# Altium PCB NRF24L01PA-MINI_2020-04-24_02-18-02.pcbdoc
Units mil, origin at the board's own origin, x right, y up, seen from the top; angles counter-clockwise.
Board outline 1844.37 x 1532.51 mil, 2 copper layers (Top Layer, Bottom Layer); 42 components, 47 nets, 169 pads, 50 vias.
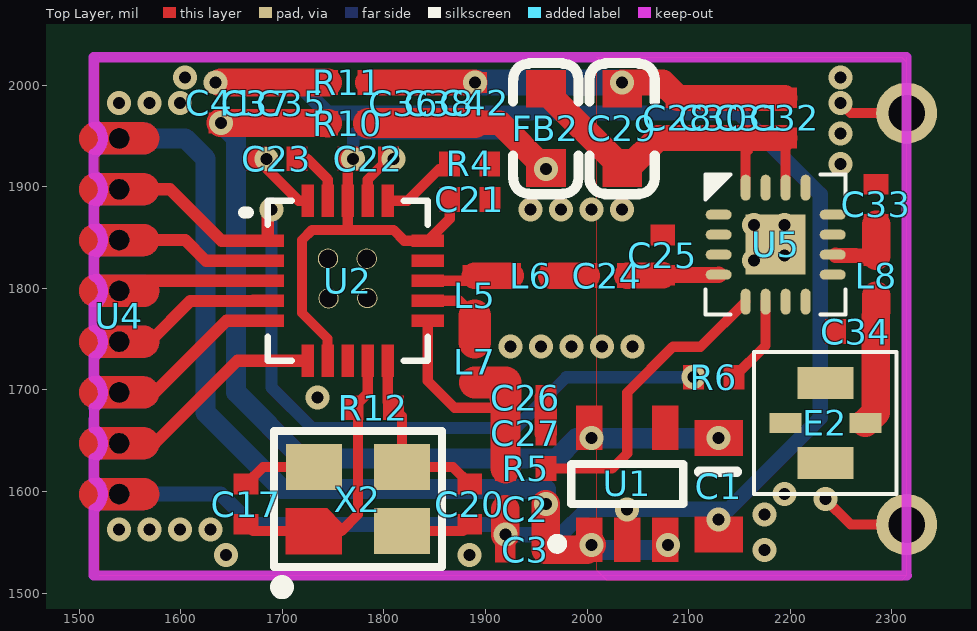
[diagram p0: Top Layer view]
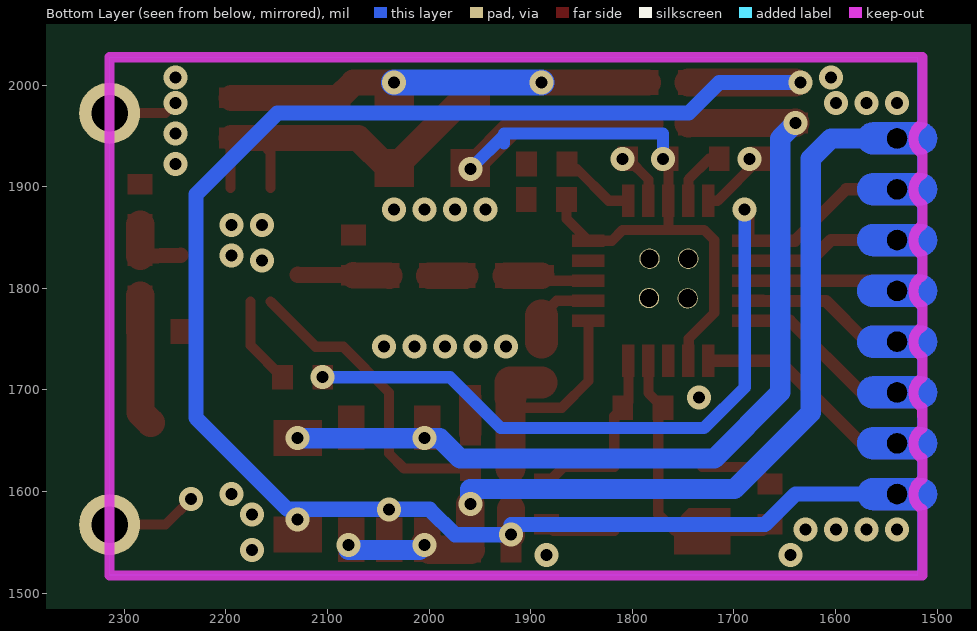
[diagram p1: Bottom Layer view, seen from below]

## Layer stack, top to bottom
Top Layer: signal copper (thickness not stored)
Dielectric: dielectric 12.6, FR-4, Dk 4.8
Bottom Layer: signal copper (thickness not stored)

## Board outline
2844.37,1000 1000,1000 1000,2532.51 2844.37,2532.51

## Components (designator, comment, footprint, x,y, rotation, side; value= is the part's Value field where it differs from the comment)
C1 "47uF" 0805 2129.37,1652.51 r270 top
C2 "2.2nF" AP-04021 1944.37,1582.51 r180 top
C3 "4.7pF" AP-04021 1944.37,1542.51 r180 top
C17 "22pF" AP-04021 1664.37,1582.51 r90 top
C20 "22pF" AP-04021 1884.37,1582.51 r90 top
C21 "10nF" AP-04021 1879.37,1887.51 r0 top
C22 "1nF" AP-04021 1779.37,1927.51 r0 top
C23 "33nF" AP-04021 1689.37,1927.51 r0 top
C24 "1.5pF" AP-04021 2014.37,1812.51 r0 top
C25 "1.0pF" AP-04021 2074.37,1827.51 r90 top
C26 "2.2nF" AP-04021 1934.37,1692.51 r0 top
C27 "4.7pF" AP-04021 1934.37,1657.51 r0 top
C28 "2.2uF" AP-04021 2089.37,1962.51 r90 top
C29 "22uF" C_0603 2034.37,1957.51 r90 top
C30 "0.1uF" AP-04021 2124.37,1962.51 r90 top
C31 "10nF" AP-04021 2159.37,1962.51 r90 top
C32 "220pF" AP-04021 2194.37,1962.51 r90 top
C33 "1.0pF" AP-04021 2284.37,1877.51 r90 top
C34 "1.0pF" AP-04021 2269.37,1757.51 r180 top
C35 "104" AP-04021 1709.37,1987.51 r270 top
C36 "106" AP-04021 1819.37,1987.51 r270 top
C37 "106" AP-04021 1674.37,1987.51 r270 top
C38 "104" AP-04021 1854.37,1987.51 r270 top
C41 "22uF" AP-04021 1639.37,1977.51 r90 top
C42 "22uF" AP-04021 1889.37,1977.51 r90 top
E2 "Antenna" IPEX 2234.37,1667.51 r0 top
FB2 "22k 1%" C_0603 1959.37,1957.51 r90 top
L5 "8.2nH" AP-04021 1889.37,1787.51 r90 top
L6 "3.9nH" AP-04021 1939.37,1812.51 r0 top
L7 "2.7nH" AP-04021 1889.37,1732.51 r270 top
L8 "3.9nH" AP-04021 2284.37,1817.51 r270 top
R4 "22k 1%" AP-04021 1889.37,1922.51 r180 top
R5 "1k" AP-04021 1934.37,1622.51 r0 top
R6 "1k" AP-04021 2119.37,1712.51 r0 top
R10 "0" AP-04021 1759.37,1962.51 r0 top
R11 "0" AP-04021 1759.37,2002.51 r0 top
R12 "1M" AP-04021 1784.37,1682.51 r0 top
U1 "LP5907" SOT23-5 2039.37,1607.51 r270 top
U2 "NRF24L01" NRF24L01 1764.37,1807.51 r0 top
U4 "GT-24" GT-24-1 1539.37,1772.51 r0 top
U5 "RFX2401C" RFX2401C 2129.37,1872.51 r0 top
X2 "16MHz" OSC-SMD_4P-L3.2-W2.5-BL 1774.37,1592.51 r0 top

## Footprints (in the part's own frame and the unit in brackets; to place one, negate y for a bottom-side part, rotate by r counter-clockwise, add the part's x,y. Pads: shape width x height; smd on the part's side, far side on the other; paste and mask are expansions set on the pad)
0805 [mil]
  round 0 smd: 1(0,0) 2(95,0)
  Top Layer region: -17.5,23.5 17.5,23.5 17.5,-23.5 -17.5,-23.5
  Top Layer region: 77.5,23.5 112.5,23.5 112.5,-23.5 77.5,-23.5
  silkscreen extent 33,-19 33,18
AP-04021 [mil]
  round 0 smd: 1(-14.68,0) 2(25,0) 2(25,0)
  Top Layer region: 15,12 35,12 35,-12 15,-12
  Top Layer region: 15,12 35,12 35,-12 15,-12
  Top Layer region: -24.69,12 -4.69,12 -4.69,-12 -24.69,-12
C_0603 [mil]
  round 0 smd: 1(-38.97,0) 2(38.97,0)
  Top Layer region: -57.28,19.29 -20.66,19.29 -20.66,-19.29 -57.28,-19.29
  Top Layer region: 20.66,19.29 57.28,19.29 57.28,-19.29 20.66,-19.29
  silkscreen extent -65,-32 64,32
GT-24-1 [mil]
  round 0 hole 19.69 slot 19.89 at 90 deg: 1(0,175) 2(0,125) 3(0,75) 4(0,25) 5(0,-25) 6(0,-75) 7(0,-125) 8(0,-175)
  Top Layer region: -23.62,159.25 -24.61,159.28 -25.6,159.38 -26.57,159.53 -27.54,159.75 -28.49,160.02 -29.42,160.36 -30.33,160.75 -31.21,161.2 -32.06,161.7 -32.88,162.26 -33.66,162.87 -34.4,163.52 -35.1,164.22 -35.76,164.96 -36.36,165.74 -36.92,166.56 -37.42,167.41 -37.87,168.29 -38.26,169.2 -38.6,170.13 -38.88,171.08 -39.09,172.05 -39.25,173.03 -39.34,174.01 -39.37,175 -39.34,175.99 -39.25,176.97 -39.09,177.95 -38.88,178.92 -38.6,179.87 -38.26,180.8 -37.87,181.7 -37.42,182.59 -36.92,183.44 -36.36,184.26 -35.76,185.04 -35.1,185.78 -34.4,186.48 -33.66,187.13 -32.88,187.74 -32.06,188.3 -31.21,188.8 -30.33,189.25 -29.42,189.64 -28.49,189.98 -27.54,190.25 -26.57,190.47 -25.6,190.62 -24.61,190.72 -23.62,190.75 23.62,190.75 24.61,190.72 25.6,190.62 26.57,190.47 27.54,190.25 28.49,189.98 29.42,189.64 30.33,189.25 31.21,188.8 32.06,188.3 32.88,187.74 33.66,187.13 34.4,186.48 35.1,185.78 35.76,185.04 36.36,184.26 36.92,183.44 37.42,182.59 37.87,181.7 38.26,180.8 38.6,179.87 38.88,178.92 39.09,177.95 39.25,176.97 39.34,175.99 39.37,175 39.34,174.01 39.25,173.03 39.09,172.05 38.88,171.08 38.6,170.13 38.26,169.2 37.87,168.29 37.42,167.41 36.92,166.56 36.36,165.74 35.76,164.96 35.1,164.22 34.4,163.52 33.66,162.87 32.88,162.26 32.06,161.7 31.21,161.2 30.33,160.75 29.42,160.36 28.49,160.02 27.54,159.75 26.57,159.53 25.6,159.38 24.61,159.28 23.62,159.25
  Top Layer region: -23.62,109.25 -24.61,109.28 -25.6,109.38 -26.57,109.53 -27.54,109.75 -28.49,110.02 -29.42,110.36 -30.33,110.75 -31.21,111.2 -32.06,111.7 -32.88,112.26 -33.66,112.87 -34.4,113.52 -35.1,114.22 -35.76,114.96 -36.36,115.74 -36.92,116.56 -37.42,117.41 -37.87,118.29 -38.26,119.2 -38.6,120.13 -38.88,121.08 -39.09,122.05 -39.25,123.03 -39.34,124.01 -39.37,125 -39.34,125.99 -39.25,126.97 -39.09,127.95 -38.88,128.92 -38.6,129.87 -38.26,130.8 -37.87,131.7 -37.42,132.59 -36.92,133.44 -36.36,134.26 -35.76,135.04 -35.1,135.78 -34.4,136.48 -33.66,137.13 -32.88,137.74 -32.06,138.3 -31.21,138.8 -30.33,139.25 -29.42,139.64 -28.49,139.98 -27.54,140.25 -26.57,140.47 -25.6,140.62 -24.61,140.72 -23.62,140.75 23.62,140.75 24.61,140.72 25.6,140.62 26.57,140.47 27.54,140.25 28.49,139.98 29.42,139.64 30.33,139.25 31.21,138.8 32.06,138.3 32.88,137.74 33.66,137.13 34.4,136.48 35.1,135.78 35.76,135.04 36.36,134.26 36.92,133.44 37.42,132.59 37.87,131.7 38.26,130.8 38.6,129.87 38.88,128.92 39.09,127.95 39.25,126.97 39.34,125.99 39.37,125 39.34,124.01 39.25,123.03 39.09,122.05 38.88,121.08 38.6,120.13 38.26,119.2 37.87,118.29 37.42,117.41 36.92,116.56 36.36,115.74 35.76,114.96 35.1,114.22 34.4,113.52 33.66,112.87 32.88,112.26 32.06,111.7 31.21,111.2 30.33,110.75 29.42,110.36 28.49,110.02 27.54,109.75 26.57,109.53 25.6,109.38 24.61,109.28 23.62,109.25
  Top Layer region: -23.62,59.25 -24.61,59.28 -25.6,59.38 -26.57,59.53 -27.54,59.75 -28.49,60.02 -29.42,60.36 -30.33,60.75 -31.21,61.2 -32.06,61.7 -32.88,62.26 -33.66,62.87 -34.4,63.52 -35.1,64.22 -35.76,64.96 -36.36,65.74 -36.92,66.56 -37.42,67.41 -37.87,68.29 -38.26,69.2 -38.6,70.13 -38.88,71.08 -39.09,72.05 -39.25,73.03 -39.34,74.01 -39.37,75 -39.34,75.99 -39.25,76.97 -39.09,77.95 -38.88,78.92 -38.6,79.87 -38.26,80.8 -37.87,81.7 -37.42,82.59 -36.92,83.44 -36.36,84.26 -35.76,85.04 -35.1,85.78 -34.4,86.48 -33.66,87.13 -32.88,87.74 -32.06,88.3 -31.21,88.8 -30.33,89.25 -29.42,89.64 -28.49,89.98 -27.54,90.25 -26.57,90.47 -25.6,90.62 -24.61,90.72 -23.62,90.75 23.62,90.75 24.61,90.72 25.6,90.62 26.57,90.47 27.54,90.25 28.49,89.98 29.42,89.64 30.33,89.25 31.21,88.8 32.06,88.3 32.88,87.74 33.66,87.13 34.4,86.48 35.1,85.78 35.76,85.04 36.36,84.26 36.92,83.44 37.42,82.59 37.87,81.7 38.26,80.8 38.6,79.87 38.88,78.92 39.09,77.95 39.25,76.97 39.34,75.99 39.37,75 39.34,74.01 39.25,73.03 39.09,72.05 38.88,71.08 38.6,70.13 38.26,69.2 37.87,68.29 37.42,67.41 36.92,66.56 36.36,65.74 35.76,64.96 35.1,64.22 34.4,63.52 33.66,62.87 32.88,62.26 32.06,61.7 31.21,61.2 30.33,60.75 29.42,60.36 28.49,60.02 27.54,59.75 26.57,59.53 25.6,59.38 24.61,59.28 23.62,59.25
  Top Layer region: -23.62,9.25 -24.61,9.28 -25.6,9.38 -26.57,9.53 -27.54,9.75 -28.49,10.02 -29.42,10.36 -30.33,10.75 -31.21,11.2 -32.06,11.7 -32.88,12.26 -33.66,12.87 -34.4,13.52 -35.1,14.22 -35.76,14.96 -36.36,15.74 -36.92,16.56 -37.42,17.41 -37.87,18.29 -38.26,19.2 -38.6,20.13 -38.88,21.08 -39.09,22.05 -39.25,23.03 -39.34,24.01 -39.37,25 -39.34,25.99 -39.25,26.97 -39.09,27.95 -38.88,28.92 -38.6,29.87 -38.26,30.8 -37.87,31.7 -37.42,32.59 -36.92,33.44 -36.36,34.26 -35.76,35.04 -35.1,35.78 -34.4,36.48 -33.66,37.13 -32.88,37.74 -32.06,38.3 -31.21,38.8 -30.33,39.25 -29.42,39.64 -28.49,39.98 -27.54,40.25 -26.57,40.47 -25.6,40.62 -24.61,40.72 -23.62,40.75 23.62,40.75 24.61,40.72 25.6,40.62 26.57,40.47 27.54,40.25 28.49,39.98 29.42,39.64 30.33,39.25 31.21,38.8 32.06,38.3 32.88,37.74 33.66,37.13 34.4,36.48 35.1,35.78 35.76,35.04 36.36,34.26 36.92,33.44 37.42,32.59 37.87,31.7 38.26,30.8 38.6,29.87 38.88,28.92 39.09,27.95 39.25,26.97 39.34,25.99 39.37,25 39.34,24.01 39.25,23.03 39.09,22.05 38.88,21.08 38.6,20.13 38.26,19.2 37.87,18.29 37.42,17.41 36.92,16.56 36.36,15.74 35.76,14.96 35.1,14.22 34.4,13.52 33.66,12.87 32.88,12.26 32.06,11.7 31.21,11.2 30.33,10.75 29.42,10.36 28.49,10.02 27.54,9.75 26.57,9.53 25.6,9.38 24.61,9.28 23.62,9.25
  Top Layer region: -23.62,-40.75 -24.61,-40.72 -25.6,-40.62 -26.57,-40.47 -27.54,-40.25 -28.49,-39.98 -29.42,-39.64 -30.33,-39.25 -31.21,-38.8 -32.06,-38.3 -32.88,-37.74 -33.66,-37.13 -34.4,-36.48 -35.1,-35.78 -35.76,-35.04 -36.36,-34.26 -36.92,-33.44 -37.42,-32.59 -37.87,-31.71 -38.26,-30.8 -38.6,-29.87 -38.88,-28.92 -39.09,-27.95 -39.25,-26.97 -39.34,-25.99 -39.37,-25 -39.34,-24.01 -39.25,-23.03 -39.09,-22.05 -38.88,-21.08 -38.6,-20.13 -38.26,-19.2 -37.87,-18.3 -37.42,-17.41 -36.92,-16.56 -36.36,-15.74 -35.76,-14.96 -35.1,-14.22 -34.4,-13.52 -33.66,-12.87 -32.88,-12.26 -32.06,-11.7 -31.21,-11.2 -30.33,-10.75 -29.42,-10.36 -28.49,-10.02 -27.54,-9.75 -26.57,-9.53 -25.6,-9.38 -24.61,-9.28 -23.62,-9.25 23.62,-9.25 24.61,-9.28 25.6,-9.38 26.57,-9.53 27.54,-9.75 28.49,-10.02 29.42,-10.36 30.33,-10.75 31.21,-11.2 32.06,-11.7 32.88,-12.26 33.66,-12.87 34.4,-13.52 35.1,-14.22 35.76,-14.96 36.36,-15.74 36.92,-16.56 37.42,-17.41 37.87,-18.3 38.26,-19.2 38.6,-20.13 38.88,-21.08 39.09,-22.05 39.25,-23.03 39.34,-24.01 39.37,-25 39.34,-25.99 39.25,-26.97 39.09,-27.95 38.88,-28.92 38.6,-29.87 38.26,-30.8 37.87,-31.71 37.42,-32.59 36.92,-33.44 36.36,-34.26 35.76,-35.04 35.1,-35.78 34.4,-36.48 33.66,-37.13 32.88,-37.74 32.06,-38.3 31.21,-38.8 30.33,-39.25 29.42,-39.64 28.49,-39.98 27.54,-40.25 26.57,-40.47 25.6,-40.62 24.61,-40.72 23.62,-40.75
  Top Layer region: -23.62,-90.75 -24.61,-90.72 -25.6,-90.62 -26.57,-90.47 -27.54,-90.25 -28.49,-89.98 -29.42,-89.64 -30.33,-89.25 -31.21,-88.8 -32.06,-88.3 -32.88,-87.74 -33.66,-87.13 -34.4,-86.48 -35.1,-85.78 -35.76,-85.04 -36.36,-84.26 -36.92,-83.44 -37.42,-82.59 -37.87,-81.71 -38.26,-80.8 -38.6,-79.87 -38.88,-78.92 -39.09,-77.95 -39.25,-76.97 -39.34,-75.99 -39.37,-75 -39.34,-74.01 -39.25,-73.03 -39.09,-72.05 -38.88,-71.08 -38.6,-70.13 -38.26,-69.2 -37.87,-68.3 -37.42,-67.41 -36.92,-66.56 -36.36,-65.74 -35.76,-64.96 -35.1,-64.22 -34.4,-63.52 -33.66,-62.87 -32.88,-62.26 -32.06,-61.7 -31.21,-61.2 -30.33,-60.75 -29.42,-60.36 -28.49,-60.02 -27.54,-59.75 -26.57,-59.53 -25.6,-59.38 -24.61,-59.28 -23.62,-59.25 23.62,-59.25 24.61,-59.28 25.6,-59.38 26.57,-59.53 27.54,-59.75 28.49,-60.02 29.42,-60.36 30.33,-60.75 31.21,-61.2 32.06,-61.7 32.88,-62.26 33.66,-62.87 34.4,-63.52 35.1,-64.22 35.76,-64.96 36.36,-65.74 36.92,-66.56 37.42,-67.41 37.87,-68.3 38.26,-69.2 38.6,-70.13 38.88,-71.08 39.09,-72.05 39.25,-73.03 39.34,-74.01 39.37,-75 39.34,-75.99 39.25,-76.97 39.09,-77.95 38.88,-78.92 38.6,-79.87 38.26,-80.8 37.87,-81.71 37.42,-82.59 36.92,-83.44 36.36,-84.26 35.76,-85.04 35.1,-85.78 34.4,-86.48 33.66,-87.13 32.88,-87.74 32.06,-88.3 31.21,-88.8 30.33,-89.25 29.42,-89.64 28.49,-89.98 27.54,-90.25 26.57,-90.47 25.6,-90.62 24.61,-90.72 23.62,-90.75
  Top Layer region: -23.62,-140.75 -24.61,-140.72 -25.6,-140.62 -26.57,-140.47 -27.54,-140.25 -28.49,-139.98 -29.42,-139.64 -30.33,-139.25 -31.21,-138.8 -32.06,-138.3 -32.88,-137.74 -33.66,-137.13 -34.4,-136.48 -35.1,-135.78 -35.76,-135.04 -36.36,-134.26 -36.92,-133.44 -37.42,-132.59 -37.87,-131.71 -38.26,-130.8 -38.6,-129.87 -38.88,-128.92 -39.09,-127.95 -39.25,-126.97 -39.34,-125.99 -39.37,-125 -39.34,-124.01 -39.25,-123.03 -39.09,-122.05 -38.88,-121.08 -38.6,-120.13 -38.26,-119.2 -37.87,-118.3 -37.42,-117.41 -36.92,-116.56 -36.36,-115.74 -35.76,-114.96 -35.1,-114.22 -34.4,-113.52 -33.66,-112.87 -32.88,-112.26 -32.06,-111.7 -31.21,-111.2 -30.33,-110.75 -29.42,-110.36 -28.49,-110.02 -27.54,-109.75 -26.57,-109.53 -25.6,-109.38 -24.61,-109.28 -23.62,-109.25 23.62,-109.25 24.61,-109.28 25.6,-109.38 26.57,-109.53 27.54,-109.75 28.49,-110.02 29.42,-110.36 30.33,-110.75 31.21,-111.2 32.06,-111.7 32.88,-112.26 33.66,-112.87 34.4,-113.52 35.1,-114.22 35.76,-114.96 36.36,-115.74 36.92,-116.56 37.42,-117.41 37.87,-118.3 38.26,-119.2 38.6,-120.13 38.88,-121.08 39.09,-122.05 39.25,-123.03 39.34,-124.01 39.37,-125 39.34,-125.99 39.25,-126.97 39.09,-127.95 38.88,-128.92 38.6,-129.87 38.26,-130.8 37.87,-131.71 37.42,-132.59 36.92,-133.44 36.36,-134.26 35.76,-135.04 35.1,-135.78 34.4,-136.48 33.66,-137.13 32.88,-137.74 32.06,-138.3 31.21,-138.8 30.33,-139.25 29.42,-139.64 28.49,-139.98 27.54,-140.25 26.57,-140.47 25.6,-140.62 24.61,-140.72 23.62,-140.75
  Top Layer region: -23.62,-190.75 -24.61,-190.72 -25.6,-190.62 -26.57,-190.47 -27.54,-190.25 -28.49,-189.98 -29.42,-189.64 -30.33,-189.25 -31.21,-188.8 -32.06,-188.3 -32.88,-187.74 -33.66,-187.13 -34.4,-186.48 -35.1,-185.78 -35.76,-185.04 -36.36,-184.26 -36.92,-183.44 -37.42,-182.59 -37.87,-181.71 -38.26,-180.8 -38.6,-179.87 -38.88,-178.92 -39.09,-177.95 -39.25,-176.97 -39.34,-175.99 -39.37,-175 -39.34,-174.01 -39.25,-173.03 -39.09,-172.05 -38.88,-171.08 -38.6,-170.13 -38.26,-169.2 -37.87,-168.3 -37.42,-167.41 -36.92,-166.56 -36.36,-165.74 -35.76,-164.96 -35.1,-164.22 -34.4,-163.52 -33.66,-162.87 -32.88,-162.26 -32.06,-161.7 -31.21,-161.2 -30.33,-160.75 -29.42,-160.36 -28.49,-160.02 -27.54,-159.75 -26.57,-159.53 -25.6,-159.38 -24.61,-159.28 -23.62,-159.25 23.62,-159.25 24.61,-159.28 25.6,-159.38 26.57,-159.53 27.54,-159.75 28.49,-160.02 29.42,-160.36 30.33,-160.75 31.21,-161.2 32.06,-161.7 32.88,-162.26 33.66,-162.87 34.4,-163.52 35.1,-164.22 35.76,-164.96 36.36,-165.74 36.92,-166.56 37.42,-167.41 37.87,-168.3 38.26,-169.2 38.6,-170.13 38.88,-171.08 39.09,-172.05 39.25,-173.03 39.34,-174.01 39.37,-175 39.34,-175.99 39.25,-176.97 39.09,-177.95 38.88,-178.92 38.6,-179.87 38.26,-180.8 37.87,-181.71 37.42,-182.59 36.92,-183.44 36.36,-184.26 35.76,-185.04 35.1,-185.78 34.4,-186.48 33.66,-187.13 32.88,-187.74 32.06,-188.3 31.21,-188.8 30.33,-189.25 29.42,-189.64 28.49,-189.98 27.54,-190.25 26.57,-190.47 25.6,-190.62 24.61,-190.72 23.62,-190.75
  Top Layer lines w10: 0,175 25,175
  Bottom Layer region: -23.62,159.25 -24.61,159.28 -25.6,159.38 -26.57,159.53 -27.54,159.75 -28.49,160.02 -29.42,160.36 -30.33,160.75 -31.21,161.2 -32.06,161.7 -32.88,162.26 -33.66,162.87 -34.4,163.52 -35.1,164.22 -35.76,164.96 -36.36,165.74 -36.92,166.56 -37.42,167.41 -37.87,168.29 -38.26,169.2 -38.6,170.13 -38.88,171.08 -39.09,172.05 -39.25,173.03 -39.34,174.01 -39.37,175 -39.34,175.99 -39.25,176.97 -39.09,177.95 -38.88,178.92 -38.6,179.87 -38.26,180.8 -37.87,181.7 -37.42,182.59 -36.92,183.44 -36.36,184.26 -35.76,185.04 -35.1,185.78 -34.4,186.48 -33.66,187.13 -32.88,187.74 -32.06,188.3 -31.21,188.8 -30.33,189.25 -29.42,189.64 -28.49,189.98 -27.54,190.25 -26.57,190.47 -25.6,190.62 -24.61,190.72 -23.62,190.75 23.62,190.75 24.61,190.72 25.6,190.62 26.57,190.47 27.54,190.25 28.49,189.98 29.42,189.64 30.33,189.25 31.21,188.8 32.06,188.3 32.88,187.74 33.66,187.13 34.4,186.48 35.1,185.78 35.76,185.04 36.36,184.26 36.92,183.44 37.42,182.59 37.87,181.7 38.26,180.8 38.6,179.87 38.88,178.92 39.09,177.95 39.25,176.97 39.34,175.99 39.37,175 39.34,174.01 39.25,173.03 39.09,172.05 38.88,171.08 38.6,170.13 38.26,169.2 37.87,168.29 37.42,167.41 36.92,166.56 36.36,165.74 35.76,164.96 35.1,164.22 34.4,163.52 33.66,162.87 32.88,162.26 32.06,161.7 31.21,161.2 30.33,160.75 29.42,160.36 28.49,160.02 27.54,159.75 26.57,159.53 25.6,159.38 24.61,159.28 23.62,159.25
  Bottom Layer region: -23.62,109.25 -24.61,109.28 -25.6,109.38 -26.57,109.53 -27.54,109.75 -28.49,110.02 -29.42,110.36 -30.33,110.75 -31.21,111.2 -32.06,111.7 -32.88,112.26 -33.66,112.87 -34.4,113.52 -35.1,114.22 -35.76,114.96 -36.36,115.74 -36.92,116.56 -37.42,117.41 -37.87,118.29 -38.26,119.2 -38.6,120.13 -38.88,121.08 -39.09,122.05 -39.25,123.03 -39.34,124.01 -39.37,125 -39.34,125.99 -39.25,126.97 -39.09,127.95 -38.88,128.92 -38.6,129.87 -38.26,130.8 -37.87,131.7 -37.42,132.59 -36.92,133.44 -36.36,134.26 -35.76,135.04 -35.1,135.78 -34.4,136.48 -33.66,137.13 -32.88,137.74 -32.06,138.3 -31.21,138.8 -30.33,139.25 -29.42,139.64 -28.49,139.98 -27.54,140.25 -26.57,140.47 -25.6,140.62 -24.61,140.72 -23.62,140.75 23.62,140.75 24.61,140.72 25.6,140.62 26.57,140.47 27.54,140.25 28.49,139.98 29.42,139.64 30.33,139.25 31.21,138.8 32.06,138.3 32.88,137.74 33.66,137.13 34.4,136.48 35.1,135.78 35.76,135.04 36.36,134.26 36.92,133.44 37.42,132.59 37.87,131.7 38.26,130.8 38.6,129.87 38.88,128.92 39.09,127.95 39.25,126.97 39.34,125.99 39.37,125 39.34,124.01 39.25,123.03 39.09,122.05 38.88,121.08 38.6,120.13 38.26,119.2 37.87,118.29 37.42,117.41 36.92,116.56 36.36,115.74 35.76,114.96 35.1,114.22 34.4,113.52 33.66,112.87 32.88,112.26 32.06,111.7 31.21,111.2 30.33,110.75 29.42,110.36 28.49,110.02 27.54,109.75 26.57,109.53 25.6,109.38 24.61,109.28 23.62,109.25
  Bottom Layer region: -23.62,59.25 -24.61,59.28 -25.6,59.38 -26.57,59.53 -27.54,59.75 -28.49,60.02 -29.42,60.36 -30.33,60.75 -31.21,61.2 -32.06,61.7 -32.88,62.26 -33.66,62.87 -34.4,63.52 -35.1,64.22 -35.76,64.96 -36.36,65.74 -36.92,66.56 -37.42,67.41 -37.87,68.29 -38.26,69.2 -38.6,70.13 -38.88,71.08 -39.09,72.05 -39.25,73.03 -39.34,74.01 -39.37,75 -39.34,75.99 -39.25,76.97 -39.09,77.95 -38.88,78.92 -38.6,79.87 -38.26,80.8 -37.87,81.7 -37.42,82.59 -36.92,83.44 -36.36,84.26 -35.76,85.04 -35.1,85.78 -34.4,86.48 -33.66,87.13 -32.88,87.74 -32.06,88.3 -31.21,88.8 -30.33,89.25 -29.42,89.64 -28.49,89.98 -27.54,90.25 -26.57,90.47 -25.6,90.62 -24.61,90.72 -23.62,90.75 23.62,90.75 24.61,90.72 25.6,90.62 26.57,90.47 27.54,90.25 28.49,89.98 29.42,89.64 30.33,89.25 31.21,88.8 32.06,88.3 32.88,87.74 33.66,87.13 34.4,86.48 35.1,85.78 35.76,85.04 36.36,84.26 36.92,83.44 37.42,82.59 37.87,81.7 38.26,80.8 38.6,79.87 38.88,78.92 39.09,77.95 39.25,76.97 39.34,75.99 39.37,75 39.34,74.01 39.25,73.03 39.09,72.05 38.88,71.08 38.6,70.13 38.26,69.2 37.87,68.29 37.42,67.41 36.92,66.56 36.36,65.74 35.76,64.96 35.1,64.22 34.4,63.52 33.66,62.87 32.88,62.26 32.06,61.7 31.21,61.2 30.33,60.75 29.42,60.36 28.49,60.02 27.54,59.75 26.57,59.53 25.6,59.38 24.61,59.28 23.62,59.25
  Bottom Layer region: -23.62,9.25 -24.61,9.28 -25.6,9.38 -26.57,9.53 -27.54,9.75 -28.49,10.02 -29.42,10.36 -30.33,10.75 -31.21,11.2 -32.06,11.7 -32.88,12.26 -33.66,12.87 -34.4,13.52 -35.1,14.22 -35.76,14.96 -36.36,15.74 -36.92,16.56 -37.42,17.41 -37.87,18.29 -38.26,19.2 -38.6,20.13 -38.88,21.08 -39.09,22.05 -39.25,23.03 -39.34,24.01 -39.37,25 -39.34,25.99 -39.25,26.97 -39.09,27.95 -38.88,28.92 -38.6,29.87 -38.26,30.8 -37.87,31.7 -37.42,32.59 -36.92,33.44 -36.36,34.26 -35.76,35.04 -35.1,35.78 -34.4,36.48 -33.66,37.13 -32.88,37.74 -32.06,38.3 -31.21,38.8 -30.33,39.25 -29.42,39.64 -28.49,39.98 -27.54,40.25 -26.57,40.47 -25.6,40.62 -24.61,40.72 -23.62,40.75 23.62,40.75 24.61,40.72 25.6,40.62 26.57,40.47 27.54,40.25 28.49,39.98 29.42,39.64 30.33,39.25 31.21,38.8 32.06,38.3 32.88,37.74 33.66,37.13 34.4,36.48 35.1,35.78 35.76,35.04 36.36,34.26 36.92,33.44 37.42,32.59 37.87,31.7 38.26,30.8 38.6,29.87 38.88,28.92 39.09,27.95 39.25,26.97 39.34,25.99 39.37,25 39.34,24.01 39.25,23.03 39.09,22.05 38.88,21.08 38.6,20.13 38.26,19.2 37.87,18.29 37.42,17.41 36.92,16.56 36.36,15.74 35.76,14.96 35.1,14.22 34.4,13.52 33.66,12.87 32.88,12.26 32.06,11.7 31.21,11.2 30.33,10.75 29.42,10.36 28.49,10.02 27.54,9.75 26.57,9.53 25.6,9.38 24.61,9.28 23.62,9.25
  Bottom Layer region: -23.62,-40.75 -24.61,-40.72 -25.6,-40.62 -26.57,-40.47 -27.54,-40.25 -28.49,-39.98 -29.42,-39.64 -30.33,-39.25 -31.21,-38.8 -32.06,-38.3 -32.88,-37.74 -33.66,-37.13 -34.4,-36.48 -35.1,-35.78 -35.76,-35.04 -36.36,-34.26 -36.92,-33.44 -37.42,-32.59 -37.87,-31.71 -38.26,-30.8 -38.6,-29.87 -38.88,-28.92 -39.09,-27.95 -39.25,-26.97 -39.34,-25.99 -39.37,-25 -39.34,-24.01 -39.25,-23.03 -39.09,-22.05 -38.88,-21.08 -38.6,-20.13 -38.26,-19.2 -37.87,-18.3 -37.42,-17.41 -36.92,-16.56 -36.36,-15.74 -35.76,-14.96 -35.1,-14.22 -34.4,-13.52 -33.66,-12.87 -32.88,-12.26 -32.06,-11.7 -31.21,-11.2 -30.33,-10.75 -29.42,-10.36 -28.49,-10.02 -27.54,-9.75 -26.57,-9.53 -25.6,-9.38 -24.61,-9.28 -23.62,-9.25 23.62,-9.25 24.61,-9.28 25.6,-9.38 26.57,-9.53 27.54,-9.75 28.49,-10.02 29.42,-10.36 30.33,-10.75 31.21,-11.2 32.06,-11.7 32.88,-12.26 33.66,-12.87 34.4,-13.52 35.1,-14.22 35.76,-14.96 36.36,-15.74 36.92,-16.56 37.42,-17.41 37.87,-18.3 38.26,-19.2 38.6,-20.13 38.88,-21.08 39.09,-22.05 39.25,-23.03 39.34,-24.01 39.37,-25 39.34,-25.99 39.25,-26.97 39.09,-27.95 38.88,-28.92 38.6,-29.87 38.26,-30.8 37.87,-31.71 37.42,-32.59 36.92,-33.44 36.36,-34.26 35.76,-35.04 35.1,-35.78 34.4,-36.48 33.66,-37.13 32.88,-37.74 32.06,-38.3 31.21,-38.8 30.33,-39.25 29.42,-39.64 28.49,-39.98 27.54,-40.25 26.57,-40.47 25.6,-40.62 24.61,-40.72 23.62,-40.75
  Bottom Layer region: -23.62,-90.75 -24.61,-90.72 -25.6,-90.62 -26.57,-90.47 -27.54,-90.25 -28.49,-89.98 -29.42,-89.64 -30.33,-89.25 -31.21,-88.8 -32.06,-88.3 -32.88,-87.74 -33.66,-87.13 -34.4,-86.48 -35.1,-85.78 -35.76,-85.04 -36.36,-84.26 -36.92,-83.44 -37.42,-82.59 -37.87,-81.71 -38.26,-80.8 -38.6,-79.87 -38.88,-78.92 -39.09,-77.95 -39.25,-76.97 -39.34,-75.99 -39.37,-75 -39.34,-74.01 -39.25,-73.03 -39.09,-72.05 -38.88,-71.08 -38.6,-70.13 -38.26,-69.2 -37.87,-68.3 -37.42,-67.41 -36.92,-66.56 -36.36,-65.74 -35.76,-64.96 -35.1,-64.22 -34.4,-63.52 -33.66,-62.87 -32.88,-62.26 -32.06,-61.7 -31.21,-61.2 -30.33,-60.75 -29.42,-60.36 -28.49,-60.02 -27.54,-59.75 -26.57,-59.53 -25.6,-59.38 -24.61,-59.28 -23.62,-59.25 23.62,-59.25 24.61,-59.28 25.6,-59.38 26.57,-59.53 27.54,-59.75 28.49,-60.02 29.42,-60.36 30.33,-60.75 31.21,-61.2 32.06,-61.7 32.88,-62.26 33.66,-62.87 34.4,-63.52 35.1,-64.22 35.76,-64.96 36.36,-65.74 36.92,-66.56 37.42,-67.41 37.87,-68.3 38.26,-69.2 38.6,-70.13 38.88,-71.08 39.09,-72.05 39.25,-73.03 39.34,-74.01 39.37,-75 39.34,-75.99 39.25,-76.97 39.09,-77.95 38.88,-78.92 38.6,-79.87 38.26,-80.8 37.87,-81.71 37.42,-82.59 36.92,-83.44 36.36,-84.26 35.76,-85.04 35.1,-85.78 34.4,-86.48 33.66,-87.13 32.88,-87.74 32.06,-88.3 31.21,-88.8 30.33,-89.25 29.42,-89.64 28.49,-89.98 27.54,-90.25 26.57,-90.47 25.6,-90.62 24.61,-90.72 23.62,-90.75
  Bottom Layer region: -23.62,-140.75 -24.61,-140.72 -25.6,-140.62 -26.57,-140.47 -27.54,-140.25 -28.49,-139.98 -29.42,-139.64 -30.33,-139.25 -31.21,-138.8 -32.06,-138.3 -32.88,-137.74 -33.66,-137.13 -34.4,-136.48 -35.1,-135.78 -35.76,-135.04 -36.36,-134.26 -36.92,-133.44 -37.42,-132.59 -37.87,-131.71 -38.26,-130.8 -38.6,-129.87 -38.88,-128.92 -39.09,-127.95 -39.25,-126.97 -39.34,-125.99 -39.37,-125 -39.34,-124.01 -39.25,-123.03 -39.09,-122.05 -38.88,-121.08 -38.6,-120.13 -38.26,-119.2 -37.87,-118.3 -37.42,-117.41 -36.92,-116.56 -36.36,-115.74 -35.76,-114.96 -35.1,-114.22 -34.4,-113.52 -33.66,-112.87 -32.88,-112.26 -32.06,-111.7 -31.21,-111.2 -30.33,-110.75 -29.42,-110.36 -28.49,-110.02 -27.54,-109.75 -26.57,-109.53 -25.6,-109.38 -24.61,-109.28 -23.62,-109.25 23.62,-109.25 24.61,-109.28 25.6,-109.38 26.57,-109.53 27.54,-109.75 28.49,-110.02 29.42,-110.36 30.33,-110.75 31.21,-111.2 32.06,-111.7 32.88,-112.26 33.66,-112.87 34.4,-113.52 35.1,-114.22 35.76,-114.96 36.36,-115.74 36.92,-116.56 37.42,-117.41 37.87,-118.3 38.26,-119.2 38.6,-120.13 38.88,-121.08 39.09,-122.05 39.25,-123.03 39.34,-124.01 39.37,-125 39.34,-125.99 39.25,-126.97 39.09,-127.95 38.88,-128.92 38.6,-129.87 38.26,-130.8 37.87,-131.71 37.42,-132.59 36.92,-133.44 36.36,-134.26 35.76,-135.04 35.1,-135.78 34.4,-136.48 33.66,-137.13 32.88,-137.74 32.06,-138.3 31.21,-138.8 30.33,-139.25 29.42,-139.64 28.49,-139.98 27.54,-140.25 26.57,-140.47 25.6,-140.62 24.61,-140.72 23.62,-140.75
  Bottom Layer region: -23.62,-190.75 -24.61,-190.72 -25.6,-190.62 -26.57,-190.47 -27.54,-190.25 -28.49,-189.98 -29.42,-189.64 -30.33,-189.25 -31.21,-188.8 -32.06,-188.3 -32.88,-187.74 -33.66,-187.13 -34.4,-186.48 -35.1,-185.78 -35.76,-185.04 -36.36,-184.26 -36.92,-183.44 -37.42,-182.59 -37.87,-181.71 -38.26,-180.8 -38.6,-179.87 -38.88,-178.92 -39.09,-177.95 -39.25,-176.97 -39.34,-175.99 -39.37,-175 -39.34,-174.01 -39.25,-173.03 -39.09,-172.05 -38.88,-171.08 -38.6,-170.13 -38.26,-169.2 -37.87,-168.3 -37.42,-167.41 -36.92,-166.56 -36.36,-165.74 -35.76,-164.96 -35.1,-164.22 -34.4,-163.52 -33.66,-162.87 -32.88,-162.26 -32.06,-161.7 -31.21,-161.2 -30.33,-160.75 -29.42,-160.36 -28.49,-160.02 -27.54,-159.75 -26.57,-159.53 -25.6,-159.38 -24.61,-159.28 -23.62,-159.25 23.62,-159.25 24.61,-159.28 25.6,-159.38 26.57,-159.53 27.54,-159.75 28.49,-160.02 29.42,-160.36 30.33,-160.75 31.21,-161.2 32.06,-161.7 32.88,-162.26 33.66,-162.87 34.4,-163.52 35.1,-164.22 35.76,-164.96 36.36,-165.74 36.92,-166.56 37.42,-167.41 37.87,-168.3 38.26,-169.2 38.6,-170.13 38.88,-171.08 39.09,-172.05 39.25,-173.03 39.34,-174.01 39.37,-175 39.34,-175.99 39.25,-176.97 39.09,-177.95 38.88,-178.92 38.6,-179.87 38.26,-180.8 37.87,-181.71 37.42,-182.59 36.92,-183.44 36.36,-184.26 35.76,-185.04 35.1,-185.78 34.4,-186.48 33.66,-187.13 32.88,-187.74 32.06,-188.3 31.21,-188.8 30.33,-189.25 29.42,-189.64 28.49,-189.98 27.54,-190.25 26.57,-190.47 25.6,-190.62 24.61,-190.72 23.62,-190.75
IPEX [mm]
  rect 0.8x0.5 smd: 1(1,0) 4(-1,0)
  rect 1.4x0.8 smd: 2(0,1) 3(0,-1)
  silkscreen extent -1.78,-1.78 1.78,1.78
NRF24L01 [mm]
  round 0.508 hole 0.457: 0(-0.495,0.549) 0(-0.48,-0.442) 0(0.472,0.549) 0(0.488,-0.434)
  round 0 smd: 1(-2,1) 2(-2,0.5) 3(-2,0) 4(-2,-0.5) 5(-2,-1) 6(-1,-2) 7(-0.5,-2) 8(0,-2) 9(0.5,-2) 10(1,-2) 11(2,-1) 12(2,-0.5) 13(2,0) 14(2,0.5) 15(2,1) 16(1,2) 17(0.5,2) 18(0,2) 19(-0.5,2) 20(-1,2)
  Top Layer region: -1.6,0.15 -1.6,-0.15 -2.4,-0.15 -2.4,0.15
  Top Layer region: -1.6,0.65 -1.6,0.35 -2.4,0.35 -2.4,0.65
  Top Layer region: -1.6,1.15 -1.6,0.85 -2.4,0.85 -2.4,1.15
  Top Layer region: -1.6,-0.35 -1.6,-0.65 -2.4,-0.65 -2.4,-0.35
  Top Layer region: -1.6,-0.85 -1.6,-1.15 -2.4,-1.15 -2.4,-0.85
  Top Layer region: 0.85,-1.6 1.15,-1.6 1.15,-2.4 0.85,-2.4
  Top Layer region: 0.35,-1.6 0.65,-1.6 0.65,-2.4 0.35,-2.4
  Top Layer region: -1.15,-1.6 -0.85,-1.6 -0.85,-2.4 -1.15,-2.4
  Top Layer region: -0.65,-1.6 -0.35,-1.6 -0.35,-2.4 -0.65,-2.4
  Top Layer region: -0.15,-1.6 0.15,-1.6 0.15,-2.4 -0.15,-2.4
  Top Layer region: 1.6,0.85 1.6,1.15 2.4,1.15 2.4,0.85
  Top Layer region: 1.6,0.35 1.6,0.65 2.4,0.65 2.4,0.35
  Top Layer region: 1.6,-1.15 1.6,-0.85 2.4,-0.85 2.4,-1.15
  Top Layer region: 1.6,-0.65 1.6,-0.35 2.4,-0.35 2.4,-0.65
  Top Layer region: 1.6,-0.15 1.6,0.15 2.4,0.15 2.4,-0.15
  Top Layer region: -0.85,1.6 -1.15,1.6 -1.15,2.4 -0.85,2.4
  Top Layer region: -0.35,1.6 -0.65,1.6 -0.65,2.4 -0.35,2.4
  Top Layer region: 1.15,1.6 0.85,1.6 0.85,2.4 1.15,2.4
  Top Layer region: 0.65,1.6 0.35,1.6 0.35,2.4 0.65,2.4
  Top Layer region: 0.15,1.6 -0.15,1.6 -0.15,2.4 0.15,2.4
  silkscreen extent -2.6,-2 2,2
OSC-SMD_4P-L3.2-W2.5-BL [mm]
  round 0 smd: 1(-1.1,-0.8)
  rect 1.4x1.15 smd: 2(1.1,-0.8) 3(1.1,0.8) 4(-1.1,0.8)
  Top Layer region: -1.8,-0.225 -0.762,-0.225 -0.4,-0.604 -0.4,-1.375 -1.8,-1.375
  silkscreen extent -2.1,-2.35 2.1,1.7
RFX2401C [mm]
  oval 0.65x0.25 smd: 1(0,0) 2(0,-0.5) 3(0,-1) 4(0,-1.5) 9(2.85,-1.5) 10(2.85,-1) 11(2.85,-0.5) 12(2.85,0)
  oval 0.25x0.65 smd: 5(0.675,-2.175) 6(1.175,-2.175) 7(1.675,-2.175) 8(2.175,-2.175) 13(2.175,0.675) 14(1.675,0.675) 15(1.175,0.675) 16(0.675,0.675)
  rect 1.5x1.5 smd: 17(1.425,-0.75)
  silkscreen extent -0.32,-2.5 3.18,1
SOT23-5 [mil]
  round 0 smd: 1(55.12,-37.4) 2(55.12,0) 3(55.12,37.4) 4(-55.12,37.4) 5(-55.12,-37.4)
  Top Layer region: -33.46,-24.61 -33.46,-50.2 -76.77,-50.2 -76.77,-24.61
  Top Layer region: -33.46,50.2 -33.46,24.61 -76.77,24.61 -76.77,50.2
  Top Layer region: 76.77,50.2 76.77,24.61 33.46,24.61 33.46,50.2
  Top Layer region: 76.77,12.8 76.77,-12.8 33.46,-12.8 33.46,12.8
  Top Layer region: 76.77,-24.61 76.77,-50.2 33.46,-50.2 33.46,-24.61
  silkscreen extent -20,-74 64,55

## Free pads (board coordinates)
  round 60 hole 36: 1(2314.37,1567.51) 1(2314.37,1972.51)

## Via types
v1: diameter 23.62, hole 11.81, Top Layer to Bottom Layer, 50 vias

## Nets (pads, with @x,y where several pads share a name; then routed paths per layer and width w, separated by ;. In a path a pad name is that pad's centre, name@x,y a point inside that pad or via, vN(x,y) a via of type N, cw(c..) or ccw(c..) an arc to the next point about the centre after c; other vN are vias at no path point)
3.3NRF: C1.1 C35.2 C37.2 C41.1 R10.1 U1.5 | length 886.7
  Top Layer w28: C41.1 R10.1
  Bottom Layer w20: v1(1639.37,1962.51) 1654.37,1947.51 1654.37,1697.51 1719.37,1632.51 1969.37,1632.51 1989.37,1652.51 v1(2004.37,1652.51) v1(2129.37,1652.51)
3.3PA: C28.1 C29.1 C30.1 C31.1 C32.1 FB2.2 U5.14 U5.16 | length 380.4
  Top Layer w10: U5.16 2155.96,1934.1 2159.37,1937.51 C31.1 ; C32.1 2195.33,1946.87 U5.14
  Top Layer w25.47: FB2.2 1959.37,1993.54 C29.1 2040.4,1918.54 2069.69,1947.83 C32.1
5V: C2.1 C3.1 U1.1 U1.3 U4.1 | length 937.8
  Top Layer w28: v1(1959.37,1587.51) 1959.37,1542.83 C3.1 1999.37,1542.51 v1(2004.37,1547.51) 2001.97,1549.91 U1.1
  Bottom Layer w10: 1930.49,1597.51 1949.37,1597.51 v1(1959.37,1587.51)
  Bottom Layer w20: U4.1 1604.37,1947.51 1624.37,1927.51 1624.37,1677.51 1699.37,1602.51 1959.37,1602.51 v1(1959.37,1587.51) ; v1(2004.37,1547.51) 2009.37,1542.51 2079.37,1542.51 v1(2079.37,1547.51)
ANT: C34.1 E2.1 L8.2 | length 129.3
  Top Layer w28: E2.1 2284.05,1677.82 C34.1 2284.37,1792.51
C17_1: C17.1 R12.1 U2.9 X2.1 | length 278.8
  Top Layer w10: C17.1 1671.19,1561.01 X2.1 1757.87,1561.01 1774.37,1577.51 1774.37,1677.83 R12.1 1784.06,1696.88 U2.9
C20_2: C20.2 R12.2 U2.10 X2.3 | length 184.1
  Top Layer w10: U2.10 1803.74,1688.14 1809.37,1682.51 1817.68,1674.2 X2.3 1867.87,1624.01 1884.37,1607.51
C24_2: C24.2 C25.1 U5.4 | length 125
  Top Layer w16: 2039.37,1812.51 C25.1 U5.4
  Top Layer w26: 2039.37,1812.51 C25.1
CE: R6.1 U2.1 U4.2 | length 827
  Top Layer w12: U4.2 1589.37,1897.51 1639.97,1846.91 1685.67,1846.91 1685.67,1873.81 v1(1689.37,1877.51)
  Bottom Layer w12: v1(1689.37,1877.51) 1689.37,1702.51 1729.37,1662.51 1929.37,1662.51 1979.37,1712.51 v1(2104.69,1712.51)
CSN: U2.2 U4.3 | length 154.7
  Top Layer w12: U4.3 1604.37,1847.51 1624.67,1827.21 1685.67,1827.21
GND: C1.2 C2.2 C3.2 C35.1 C37.1 C41.2 R11.1 U1.2 U4.8 | length 1750.9
  Top Layer w27.48: v1@1639.37,2002.51 R11.1
  Top Layer w28: v1(1919.37,1557.51) 1919.37,1582.51
  Bottom Layer w15: U4.8 1639.37,1597.51 1669.37,1567.51 1919.37,1567.51 v1(1919.37,1557.51) 1964.37,1557.51 1974.37,1557.51 1999.37,1582.51 2139.37,1582.51 2229.37,1672.51 2229.37,1892.51 2149.37,1972.51 1744.37,1972.51 1714.37,2002.51 v1(1634.37,2002.51)
  other v1: 2129.37,1572.51 2039.37,1582.51
IRQ: U2.6 U4.7 | length 219.3
  Top Layer w12: U4.7 1574.37,1647.51 1655.67,1728.81 U2.6
L6_2: C24.1 L6.2 | length 70.6
  Top Layer w16: 1964.37,1812.51 C24.1
  Top Layer w26: 1964.37,1812.51 C24.1
MISO: U2.5 U4.6 | length 175.5
  Top Layer w12: U4.6 1574.37,1697.51 1644.97,1768.11 1685.67,1768.11
MOSI: U2.4 U4.5 | length 162.9
  Top Layer w12: U4.5 1569.37,1747.51 1609.37,1787.51 1685.67,1787.81
RF_3V3: C21.1 C22.1 C36.2 C38.2 C42.1 FB2.1 R10.2 U2.7 U2.15 U2.18 | length 926
  Top Layer w10: 1744.37,1728.81 1744.37,1750.71 1719.37,1775.71 1719.37,1847.51 1729.37,1857.51 1764.37,1857.51 ; U2.18 1764.37,1857.51 ; U2.18 1764.37,1927.19 C22.1 ; C21.1 1864.69,1868.46 U2.15 1820,1846.88 1809.37,1857.51 1764.37,1857.51
  Top Layer w24: C42.1 1914.05,1962.83 v1(1959.37,1917.51)
  Top Layer w30: 1784.37,1962.51 C42.1
  Bottom Layer w12: v1(1769.69,1927.51) 1769.67,1952.51 1926.37,1952.51 1926.37,1942.51 ; 1814.37,1952.51 1924.37,1952.51 v1(1959.37,1917.51)
RFGND: C17.2 C20.1 C21.2 C22.2 C23.1 C25.2 C26.2 C27.2 C28.2 C29.2 C30.2 C31.2 C32.2 C33.2 C34.2 C36.1 C38.1 C42.2 E2.2 pad.1 R4.1 R11.2 U2.0 U2.8 U2.14 U2.17 U2.20 U5.1 U5.2 U5.3 U5.7 U5.8 U5.9 U5.11 U5.12 U5.15 U5.17 X2.2 X2.4 | length 870.8
  Top Layer w10: 1664.37,1607.51 1680.87,1624.01 X2.4 ; C23.1 1715.95,1886.25 U2.20 ; U2.17 1784.06,1907.2 v1@1804.37,1927.51 ; X2.2 1877.55,1561.01 C20.1 ; v1(2234.37,1592.51) 2259.37,1567.51 pad.1@2314.37,1567.51 ; v1(2249.37,1982.51) 2259.37,1972.51 pad.1@2314.37,1972.51
  Top Layer w22: 1959.37,1657.51 1959.37,1692.51
  Top Layer w25.47: 1784.37,2002.51 v1(1889.37,2002.51) ; v1(2034.37,2002.51) 2074.37,2002.51 2089.37,1987.51 2194.37,1987.51
  Bottom Layer w25.47: v1(1889.37,2002.51) v1(2034.37,2002.51)
  other v1: 1644.37,1537.51 1884.37,1537.51 2174.37,1542.51 1539.37,1562.51 1569.37,1562.51 1599.37,1562.51 1629.37,1562.51 2174.37,1577.51 2194.37,1597.51 1734.37,1692.51 1924.37,1742.51 1954.37,1742.51 1984.37,1742.51 2014.37,1742.51 2044.37,1742.51 2164.37,1827.51 2194.37,1832.51 2164.37,1862.51 2194.37,1862.51 1944.37,1877.51 1974.37,1877.51 2004.37,1877.51 2034.37,1877.51 2249.37,1922.51 1684.37,1927.51 1809.37,1927.51 2249.37,1952.51 1539.37,1982.51 1569.37,1982.51 1599.37,1982.51 1604.37,2007.51 2249.37,2007.51
S$3479: 
S$3493: 
S$3496: 
S$3498: 
S$3500: 
S$3502: 
S$3504: 
S$3507: 
S$3509: 
S$3530: 
S$3535: 
S$3537: 
S$3540: 
S$3589: 
S$3591: 
S$3593: 
S$3619: 
S$3621: 
S$3710: 
S$3713: 
S$3715: 
S$3717: 
SCK: U2.3 U4.4 | length 150.4
  Top Layer w12: U4.4 1549.37,1807.51 U2.3
U2_11: C26.1 C27.1 L7.2 R5.1 U2.11 | length 266.3
  Top Layer w10: U2.11 1843.11,1708.77 1869.37,1682.51 1909.69,1682.51 C26.1
  Top Layer w29.49: R5.1 C26.1
  Top Layer w31.5: 1889.37,1707.51 1919.69,1707.51 C26.1
U2_12: L5.1 L7.1 U2.12 | length 78.1
  Top Layer w10: U2.12 1874.38,1787.82 L5.1
  Top Layer w32.09: L7.1 L5.1
U2_13: L5.2 L6.1 U2.13 | length 119
  Top Layer w10: U2.13 1884.37,1807.51 1889.37,1812.51
  Top Layer w16: 1889.37,1812.51 L6.1
  Top Layer w26: 1889.37,1812.51 L6.1
U2_16: R4.2 U2.16 | length 75.6
  Top Layer w10: 1803.77,1886.21 1823.07,1886.21 1854.37,1917.51 1859.37,1917.51 1864.37,1922.51
U2_19: C23.2 U2.19 | length 59.7
  Top Layer w10: 1714.37,1927.51 1724.37,1927.51 1744.67,1907.21 U2.19
U5_5: R5.2 U5.5 | length 299.8
  Top Layer w10: 1959.37,1622.51 2024.37,1622.51 2039.37,1637.51 2039.37,1697.51 2084.37,1742.51 2111.59,1742.51 U5.5
U5_6: R6.2 U5.6 | length 87.3
  Top Layer w10: 2144.37,1712.51 2175.64,1743.78 U5.6
U5_10: C33.1 L8.1 U5.10 | length 104.1
  Top Layer w15: U5.10@2244.37,1832.51 2287.17,1831.61
  Top Layer w18: L8.1 C33.1
  Top Layer w28: L8.1 C33.1
pads on no net: E2.3 E2.4 U1.4 U5.13

## Polygon pours and split planes (outlines as drawn)
RFGND on Top Layer (solid): 1524.37,1517.51 2314.37,1517.51 2314.37,2027.51 1519.37,2027.51 1519.37,1517.51 1529.37,1517.51
RFGND on Bottom Layer (solid): 1519.37,1517.51 2314.37,1517.51 2314.37,2027.51 1519.37,2027.51 1519.37,1517.51
GND on Top Layer (solid): 2009.37,2027.51 2309.37,2027.51 2314.37,2022.51 2314.37,1517.51 2309.37,1512.51 2019.37,1512.51 2009.37,1522.51 2009.37,2017.51 2014.37,2022.51

## Keep-outs
Keep-Out Layer:
  lines w10: 1514.21,1612.2 cw(c1506.61,1597.31) 1514.37,1582.51 ; 1514.21,1662.2 cw(c1506.61,1647.31) 1514.37,1632.51 ; 1514.21,1812.2 cw(c1506.61,1797.31) 1514.37,1782.51 ; 1514.21,1862.2 cw(c1506.61,1847.31) 1514.37,1832.51 ; 1514.21,1912.2 cw(c1506.61,1897.31) 1514.37,1882.51 ; 1514.21,1962.2 cw(c1506.61,1947.31) 1514.37,1932.51
  lines w10 net S$3500: 1514.21,1712.2 cw(c1506.61,1697.31) 1514.37,1682.51 ; 1514.21,1762.2 cw(c1506.61,1747.31) 1514.37,1732.51

## Other copper
Top Layer:
  pour cut-out: 1884.37,1862.51 2104.37,1862.51 2104.37,1757.51 1884.37,1757.51 1884.37,1862.51
  pour cut-out net 3.3PA: 1764.37,1945.01 2219.37,1945.01 2224.37,1950.01 2224.37,2020.01 1764.37,2020.01 1764.37,1945.01

## Silkscreen, mask and mechanical layers (free items; w line width, h text height)
Document:
  lines w0.1: 1921.18,1765.25 1923.18,1767.25